# Altium PCB pow_hw_3_V02.00.PcbDoc
Units mil, origin at the board's own origin, x right, y up, seen from the top; angles counter-clockwise.
Board outline 1035 x 1115 mil, 2 copper layers (Top Layer, Bottom Layer); 26 components, 17 nets, 69 pads, 16 vias.
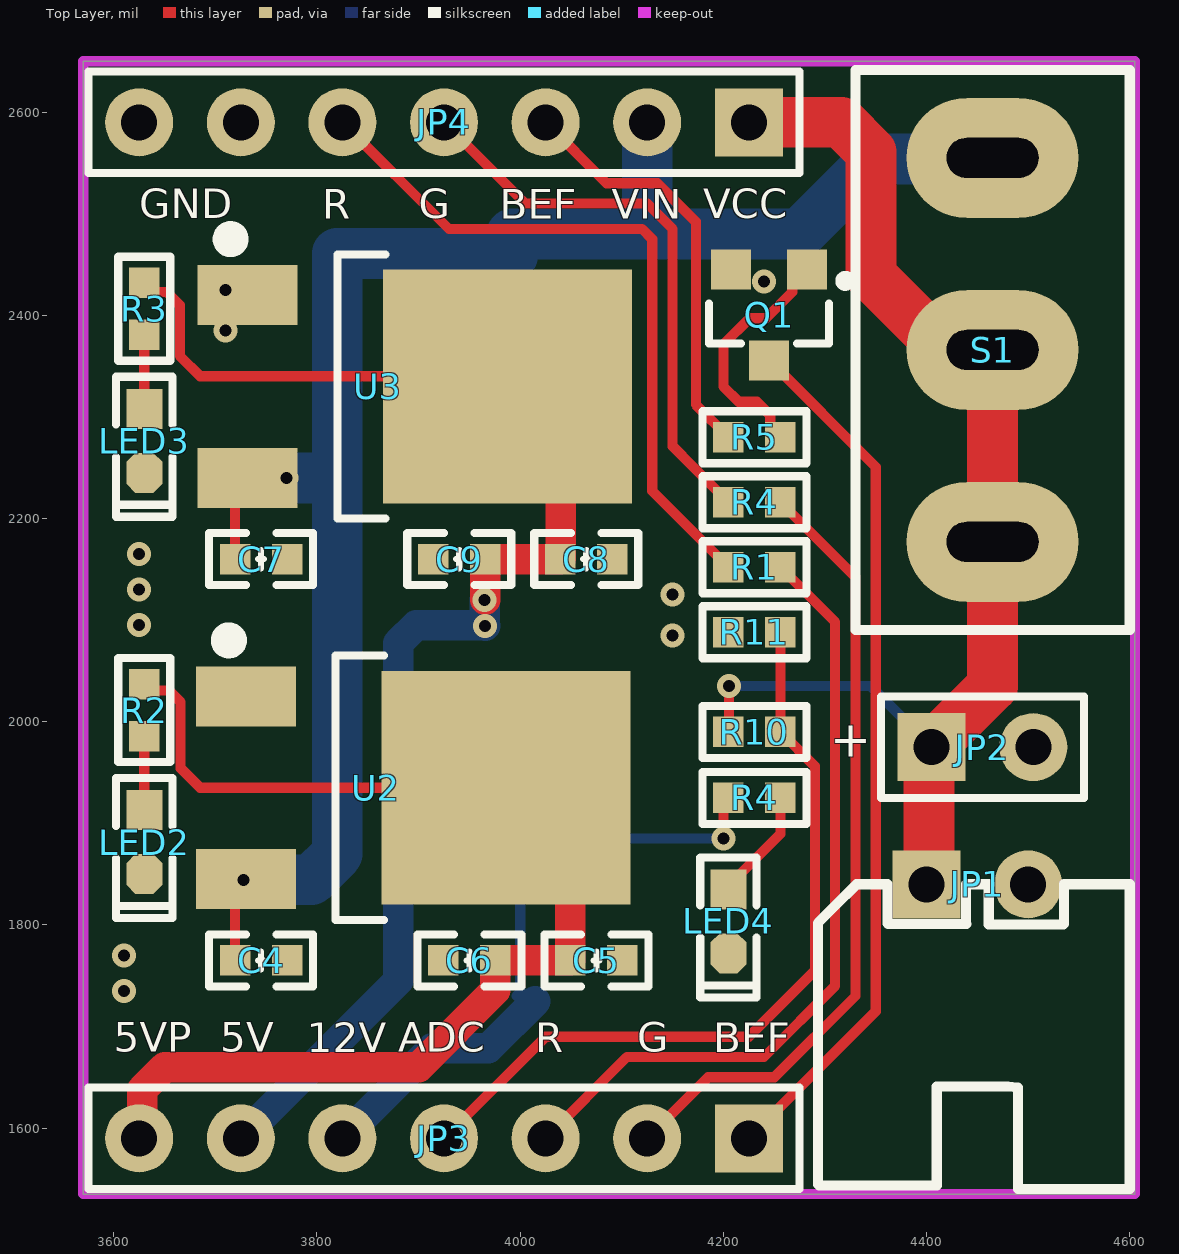
[diagram p0: Top Layer view]
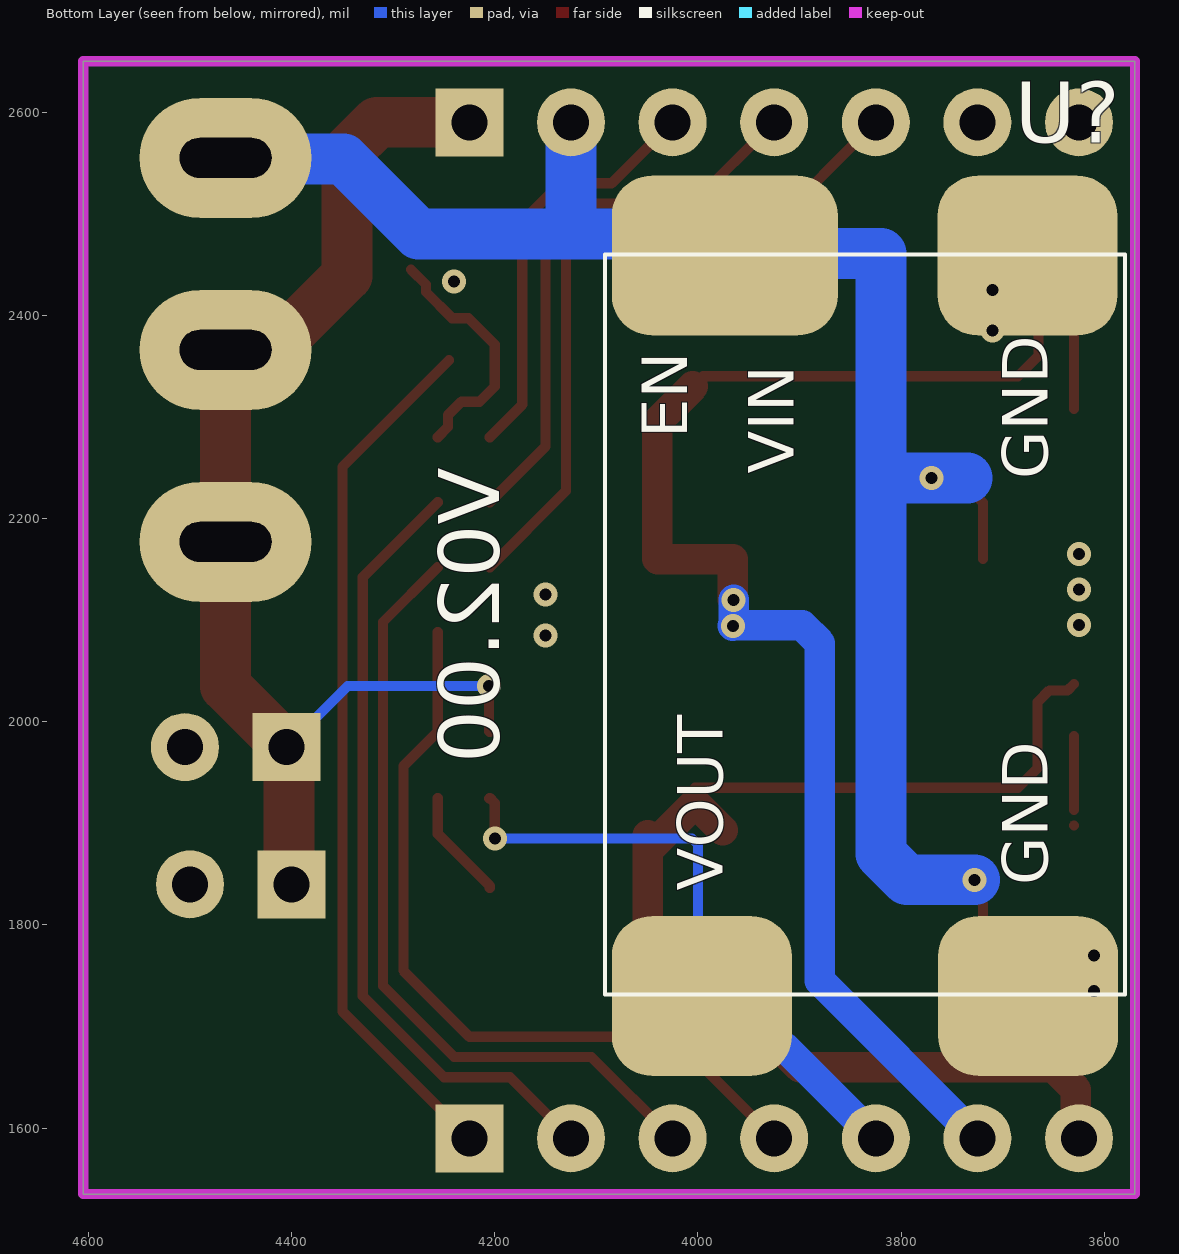
[diagram p1: Bottom Layer view, seen from below]

## Layer stack, top to bottom
Top Solder: solder mask 0.4, Solder Resist, Dk 3.5
Top Layer: signal copper 1.4
Dielectric 1: dielectric 12.6, FR-4, Dk 4.8
Bottom Layer: signal copper 1.4
Bottom Solder: solder mask 0.4, Solder Resist, Dk 3.5

## Board outline
3570,1535 4605,1535 4605,2650 3570,2650

## Design rules (kind name [scope] priority, off if disabled: settings)
Clearance [All] p1: gap=10 ignorepadtopadclearanceinfootprint=FALSE
PlaneConnect [All] p1: planeconnectstyle=Direct reliefexpansion=20 reliefentries=4 reliefconductorwidth=10 reliefairgap=10
PolygonConnect [All] p1: connectstyle=Direct reliefconductorwidth=10 reliefentries=4 polygonreliefangle="90 Angle" airgapwidth=10
RoutingVias [All] p1: holewidth=28 width=50 viastyle="Through Hole" minholewidth=28 minwidth=50 maxholewidth=28 maxwidth=50
SolderMaskExpansion [All] p1: expansion=4 istentingtop=FALSE
SupplyNets "Schematic Supply Nets_8" [InNet('5V')] p1: voltage=0.000
SupplyNets "Schematic Supply Nets_7" [InNet('12V')] p2: voltage=0.000
SupplyNets "Schematic Supply Nets_4" [InNet('5V_POW')] p3: voltage=0.000
SupplyNets "Schematic Supply Nets_5" [InNet('GND')] p4: voltage=0.000
SupplyNets "Schematic Supply Nets_2" [InNet('VCC')] p5: voltage=0.000
SupplyNets "Schematic Supply Nets_1" [InNet('VIN')] p6: voltage=0.000
Width [All] p1: maxlimit=100 minlimit=10 preferedwidth=10 minimp=50.000000 maximp=50.000000 favimp=50.000000
29 further rules are at their usual default settings.

## Components (designator, comment, footprint, x,y, rotation, side; value= is the part's Value field where it differs from the comment)
C4 "10uF" "C 0603_L" 3745,1765 r0 top
C5 "100nF" "C 0603_L" 4075,1765 r0 top
C6 "10uF" "C 0603_L" 3950,1765 r180 top
C7 "10uF" "C 0603_L" 3745,2160 r0 top
C8 "100nF" "C 0603_L" 4065,2160 r0 top
C9 "10uF" "C 0603_L" 3940,2160 r180 top
JP1 "HDR-1X2" XH2.54-WI-2P 4450,1840 r0 top
JP2 "HDR-1X2" HDR2.54-LI-2P 4455,1975 r0 top
JP3 "HDR-1X7" HDR2.54-LI-7P 3925,1590 r180 top
JP4 "HDR-1X7" HDR2.54-LI-7P 3925,2590 r180 top
LED2 "Colour" "LED 0603R" 3630,1881.5 r270 top
LED3 "Colour" "LED 0603R" 3630,2276.5 r270 top
LED4 "Colour" "LED 0603R" 4205,1803.5 r270 top
Q1 "SS8050" SOT23-3L 4245,2400 r180 top
R1 "1K" "R 0603_L" 4230.59,2152 r0 top
R2 "2K" "R 0603_L" 3630,2011.5 r270 top
R3 "2K" "R 0603_L" 3630,2406.5 r270 top
R4 "2K" "R 0603_L" 4230.59,1925 r0 top
R4 "1K" "R 0603_L" 4230.59,2216 r0 top
R5 "1K" "R 0603_L" 4230.59,2280 r0 top
R10 "18K" "R 0603_L" 4230.59,1990 r0 top
R11 "10K" "R 0603_L" 4230.59,2088 r180 top
S1 "SS-12F23" SS-12D10 4465,2366.02 r90 top
U2 "AMS1086CD-5.0" TO252 3838.27,1935.04 r270 top
U3 "AMS1086CD-3.3" TO252 3840,2330 r270 top
U? "temp_12VDC" TEMP_12VDC 3845.68,2098.82 r90 bottom

## Footprints (in the part's own frame and the unit in brackets; to place one, negate y for a bottom-side part, rotate by r counter-clockwise, add the part's x,y. Pads: shape width x height; smd on the part's side, far side on the other; paste and mask are expansions set on the pad)
"C 0603_L" [mil] "无极性贴片电容"
  rect 30x30 smd: 1(-25.59,0) 2(25.59,0)
  silkscreen extent -51,-26 51,26, body extent -31,-16 31,16, height 32
HDR2.54-LI-2P [mm] "排针，2脚"
  rect 1.7x1.7 hole 0.9: 1(-1.27,0)
  round 1.7 hole 0.9: 2(1.27,0)
  silkscreen extent -2.54,-1.27 2.54,1.27, body extent -2.54,-1.27 2.54,1.27, height 8.5
HDR2.54-LI-7P [mm] "排针，8脚"
  rect 1.7x1.7 hole 0.9: 1(-7.62,0)
  round 1.7 hole 0.9: 2(-5.08,0) 3(-2.54,0) 4(0,0) 5(2.54,0) 6(5.08,0) 7(7.62,0)
  silkscreen extent -8.89,-1.27 8.89,1.27, body extent -8.89,-1.27 8.89,1.27, height 8.5
"LED 0603R" [mm] "红色0603LED"
  rect 1x0.9 smd: 1(-0.8,0)
  oct 1x0.9 smd: 2(0.8,0)
  silkscreen extent -1.6,-0.7 1.9,0.7, body extent -0.8,-0.4 0.8,0.4, height 0.47
"R 0603_L" [mil] "1/10W贴片电阻"
  rect 30x30 smd: 1(-25.59,0) 2(25.59,0)
  silkscreen extent -51,-26 51,26, body extent -31,-16 32,16, height 16
SOT23-3L [mm] "3x1.3x1mm(长宽高)"
  rect 1x1 smd: 1(-0.95,-1.143) 2(0.95,-1.143) 3(0,1.125)
  silkscreen extent -2.03,-0.99 1.5,0.7, body extent -1.5,-1.2 1.5,1.2, height 1.05
SS-12D10 [mm] "脚距4.8mm"
  oval 3x4.3 hole 2.3 slot 1 at 0 deg: 1(-4.8,0) 2(0,0) 3(4.8,0)
  silkscreen extent -7,-3.43 7,3.43, body extent -6.71,-3.3 6.71,3.3, height 11.8
TEMP_12VDC [mm] "通用升降压模块"
  rrect50% 4x5.5 smd paste+0 mask+0.051: 1(9.144,3.175) 2(9.144,3.325)
  rrect50% 4x4.5 smd paste+0 mask+0.051: 3(9.144,-4.318) 4(-9.368,3.825) 5(-9.368,-4.335)
  silkscreen extent -9.33,-6.76 9.17,6.24, body extent -9.33,-6.76 9.17,6.24, height 0.25
TO252 [mm] "252晶体管"
  rect 1.5x2.5 smd: 1(-2.285,-2.75) 3(2.285,-2.75)
  rect 5.842x6.223 smd: 2(0,3.75)
  silkscreen extent -3.88,-3.37 3.3,0.7, body extent -3.25,-3.05 3.25,6.37, height 2.3
XH2.54-WI-2P [mm] "接插件，2P"
  rect 1.7x1.7 hole 0.9: 1(-1.27,0)
  round 1.7 hole 0.9: 2(1.27,0)
  silkscreen extent -3.99,-7.62 3.81,0, body extent -3.77,-7.35 3.77,0.35, height 5.73

## Part data
C4 C5 C6 C7 C8 C9: library part C, "无极性贴片电容", BOM名称=无极性贴片电容, 学习资源=www.ooocke.com, 版权归属=源创客
JP1 JP2: library part "Header 2", "2P接插件", BOM名称=2P接插件, 学习资源=www.ooocke.com, 版权归属=源创客
JP3 JP4: library part "Header 7", "7P接插件", BOM名称=7P接插件, 学习资源=www.ooocke.com, 版权归属=源创客
LED2 LED3 LED4: library part LED-SMD, "贴片LED", BOM名称=贴片LED, 学习资源=www.ooocke.com, 版权归属=源创客
Q1: library part 8050-SMD, "高频放大-NPN型", BOM名称=高频放大-NPN型, 学习资源=www.ooocke.com, 属性="40V 1.5A 1W 100MHZ", 版权归属=源创客
R1 R4 R5: library part R, "贴片电阻", BOM名称=贴片电阻, 学习资源=www.ooocke.com, 版权归属=源创客
R2 R3 R4 R10 R11: library part 电阻, "贴片电阻1%精度"
S1: library part SSW-1P, "1路拨动开关", BOM名称=波动开关, 学习资源=www.ooocke.com, 版权归属=源创客
U3: library part AMS1086CD-5.0
U?: "通用升降压模块"

## Via types
v1: diameter 23.62, hole 11.81, Top Layer to Bottom Layer, 16 vias

## Nets (pads, with @x,y where several pads share a name; then routed paths per layer and width w, separated by ;. In a path a pad name is that pad's centre, name@x,y a point inside that pad or via, vN(x,y) a via of type N, cw(c..) or ccw(c..) an arc to the next point about the centre after c; other vN are vias at no path point)
5V: C8.1 C9.1 JP3.6 R3.1 U3.2 | length 1414.9
  Top Layer w10: R3.1 3639.15,2422.93 3652.05,2422.93 3665,2409.98 3665,2360 3685,2340 3995,2340 U3.2@4005,2330
  Top Layer w30: v1@3965.59,2120 C9.1 C8.1 4040,2160.59 4040,2295 U3.2@4005,2330
  Bottom Layer w30: JP3.6 3880,1745 3880,2077.43 3897.57,2095 v1@3965,2095 ; v1(3965,2120) v1@3965,2095 ; v1(3965.59,2094.41) v1@3965,2095
5V_POW: C5.1 C6.1 JP3.7 R2.1 U2.2 | length 1221.1
  Top Layer w10: R2.1 3636.23,2030.86 3654.14,2030.86 3665.79,2019.21 3665.79,1954.21 3685,1935 U2.2@4002.64,1935
  Top Layer w30: JP3.7 3627.98,1592.98 3627.98,1637.98 3650,1660 3900,1660 3975.59,1735.59 C6.1 C5.1 U2.2@4049.41,1888.23 ; U2.2@3975.59,1892.96 4002.64,1920 U2.2@4049.41,1873.23
12V: JP3.5 R4.1@4205,1925 U?.4 | length 641.9
  Top Layer w10: v1(4200,1885) 4200,1920 4205,1925 R4.1@4205.59,1924.41
  Bottom Layer w10: U?.4 4000,1733.74 4000,1879.14 4005.86,1885 v1(4200,1885)
  Bottom Layer w30: JP3.5 3913.55,1678.55 3968.55,1678.55 U?.4@4015,1725
ADC_OUT: JP3.4 R10.2 R11.1 | length 780.4
  Top Layer w10: JP3.4 4025,1690 4225,1690 4290,1755 4290,1956.18 R10.2 R11.1
BEEF_IN: JP4.3 R5.1 | length 413.8
  Top Layer w10: JP4.3 4085,2530 4135,2530 4172.91,2492.09 4172.91,2312.09 R5.1
BEEF_OUT: JP3.1 Q1.3 | length 861
  Top Layer w10: JP3.1 4350,1715 4350,2250.71 Q1.3
GND: C4.2 C5.2 C6.2 C7.2 C8.2 C9.2 JP1.2 JP2.2 JP4.6 JP4.7 LED2.2 LED3.2 LED4.2 Q1.2 R11.2 U2.1 U3.1 U?.3 U?.5
  other v1: 3610,1735 3610,1770 4150,2085 3625,2095 4150,2125 3625,2130 3625,2165 3710,2385 3710,2425 4240,2433.19
LED_G_IN: JP4.4 R4.1@4205,2216 | length 560.3
  Top Layer w10: JP4.4 4005,2510 4125,2510 4150,2485 4150,2271 4170.5,2250.5 R4.1@4205,2216
LED_G_OUT: JP3.2 R4.2@4256.18,2216 | length 789.6
  Top Layer w10: JP3.2@4125,1600 JP3.2 4185,1650 4250,1650 4330,1730 4330,2142.18 R4.2@4256.18,2216
LED_R_IN: JP4.5 R1.1 | length 706.7
  Top Layer w10: JP4.5 3930,2485 4120,2485 4130,2475 4130,2227 R1.1
LED_R_OUT: JP3.3 R1.2 | length 781.4
  Top Layer w10: JP3.3 4105,1670 4240,1670 4310,1740 4310,2098.18 R1.2
NetLED2_1: LED2.1 R2.2 | length 72.9
  Top Layer w10: LED2.1 R2.2
NetLED3_1: LED3.1 R3.2 | length 72.9
  Top Layer w10: LED3.1 R3.2
NetLED4_1: LED4.1 R4.2@4256.18,1925 | length 109.7
  Top Layer w10: LED4.1@4205,1836.5 4205,1838.46 4256.18,1889.65 R4.2@4256.18,1925
NetQ1_1: Q1.1 R5.2 | length 242.3
  Top Layer w10: R5.2 4246.18,2290 4246.18,2301.72 4232.9,2315 4215,2315 4200,2330 4200,2371.29 4225.85,2397.14 4241.87,2397.14 4267.72,2422.99 4267.72,2430.31 Q1.1
VCC: C4.1 C7.1 JP4.2 S1.3 U2.3 U3.3 U?.1 U?.2 | length 1730.7
  Top Layer w10: C4.1 3719.41,1820.51 3743.93,1845.04 U2.3@3746.73,1845.04 ; C7.1 3719.41,2215.51 3743.93,2240.04 U3.3@3749.09,2240.04
  Bottom Layer w50: v1(3727.74,1844.35) 3794.35,1844.35 3820,1870 3820,2240 ; 3735,2240 v1(3770,2240) 3820,2240 ; U?.1@3991.86,2480 4275,2480 4348.93,2553.93 4463.93,2553.93 S1.3 ; U?.1@3992.43,2458.82 U?.1 3968.79,2460.71 3820,2460.71 3820,2240 ; 4125,2503.69 JP4.2
VIN: JP1.1 JP2.1 JP4.1 R10.1 S1.1 S1.2 | length 1226.5
  Top Layer w10: R10.1 4205.59,1990.59 v1(4205.59,2035)
  Top Layer w50: JP4.1 4316.06,2590 4345.35,2560.71 4345.35,2439.01 4405.31,2379.06 4451.97,2379.06 S1.2 S1.1 4465,2035 JP2.1 4402.5,1972.5 4402.5,1842.5 JP1.1
  Bottom Layer w10: v1(4205.59,2035) 4345,2035 JP2.1

## Polygon pours and split planes (outlines as drawn)
GND on Top Layer "NONET_L01_P000" (solid, shelved, pour order 0): 3569.6,1535.29 4604.6,1535.29 4604.6,2650.29 3569.6,2650.29
GND on Bottom Layer "NONET_L02_P001" (solid, shelved, pour order 1): 3570,1535 4605,1535 4605,2650 3570,2650

## Keep-outs
Keep-Out Layer:
  the board outline again, w10

## Silkscreen, mask and mechanical layers (free items; w line width, h text height)
Top Overlay:
  text "GND" at 3625,2485.52 h50
  text "G" at 3900,2485.52 h50
  text "VCC" at 4180.03,2485.52 h50
  text "R" at 3805,2485 h50
  text "BEF" at 3980,2485 h50
  text "VIN" at 4090.03,2485 h50
  text "+" at 4305,1953.8 h60
  text "5VP" at 3600,1665.52 h50
  text "5V" at 3705,1665.52 h50
  text "ADC" at 3880,1665.52 h50
  text "G" at 4115,1665.52 h50
  text "12V" at 3790,1665 h50
  text "R" at 4015,1665 h50
  text "BEF" at 4190,1665 h50
Bottom Overlay:
  text "V02.00" at 4195.59,2250 h60 r270

## Text inside footprints (layer, text, board x,y; h text height)
U?: Bottom Overlay "GND" at 3655.68,2238.82 h45 r270; Bottom Overlay "GND" at 3655.68,1838.82 h45 r270; Bottom Overlay "VOUT" at 3975.68,1833.82 h45 r270; Bottom Overlay "EN" at 4010.68,2278.82 h45 r270; Bottom Overlay "VIN" at 3905.68,2243.82 h45 r270